# EAGLE board hw2 (EAGLE 7.5.0)
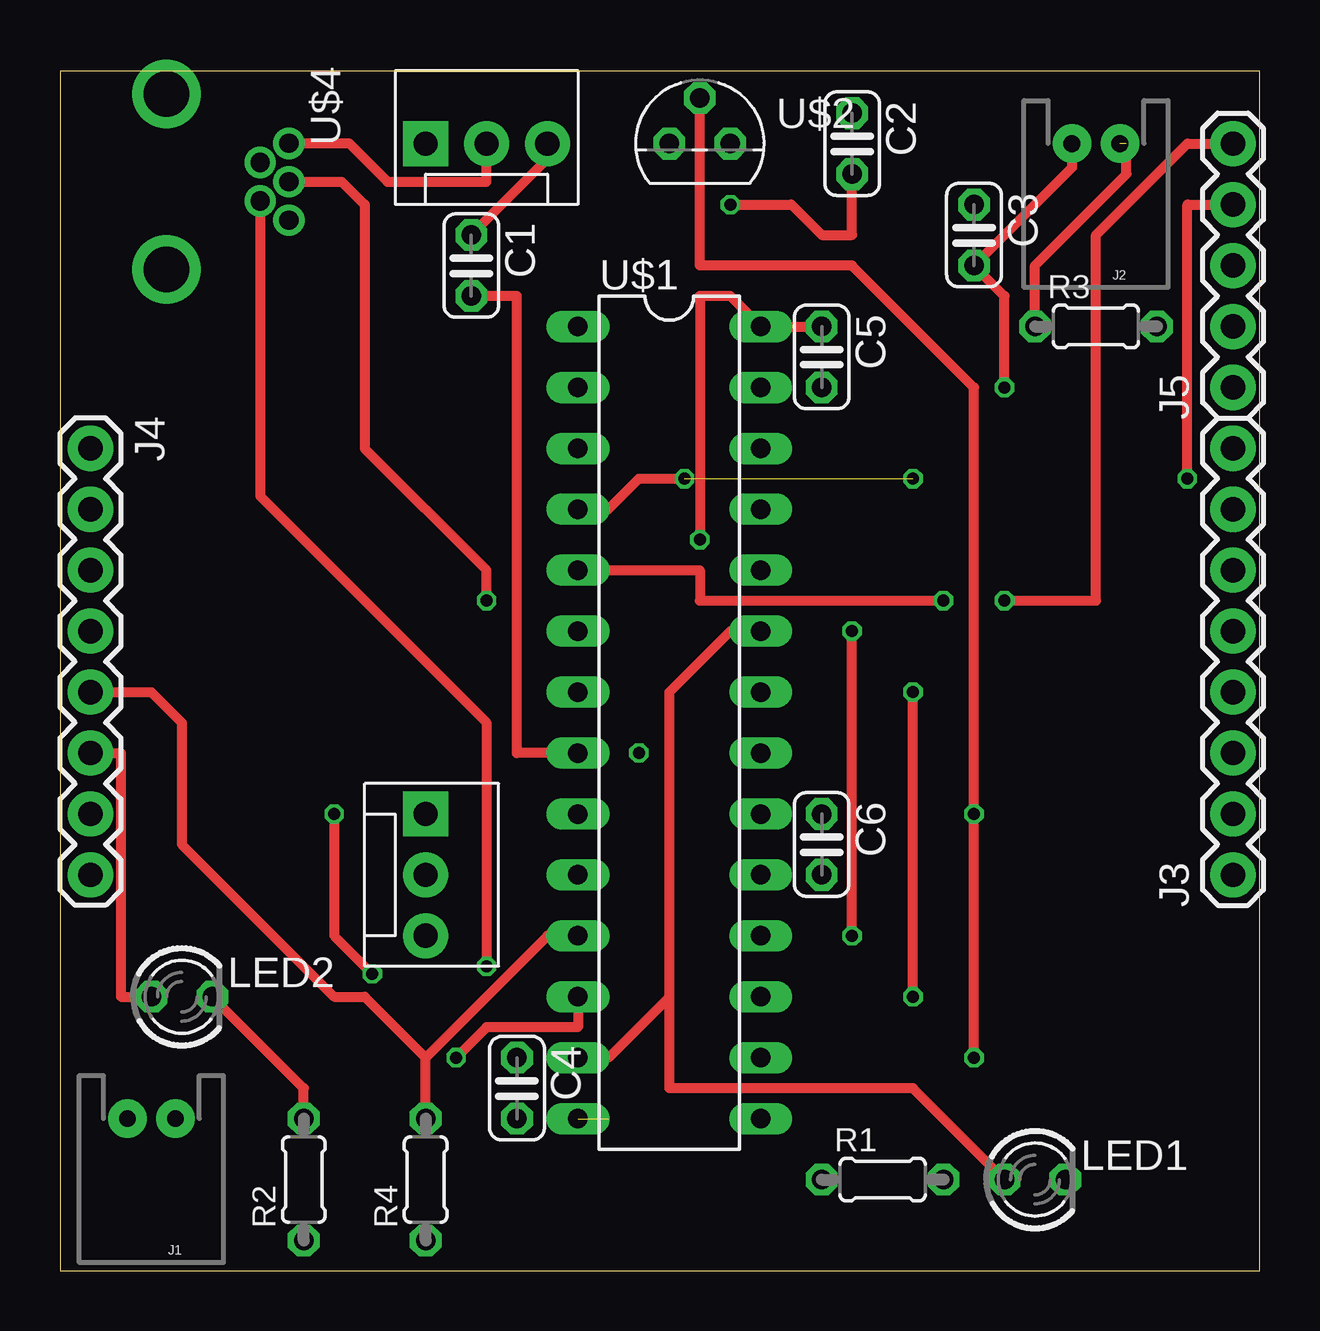
[diagram p0: board, top side]
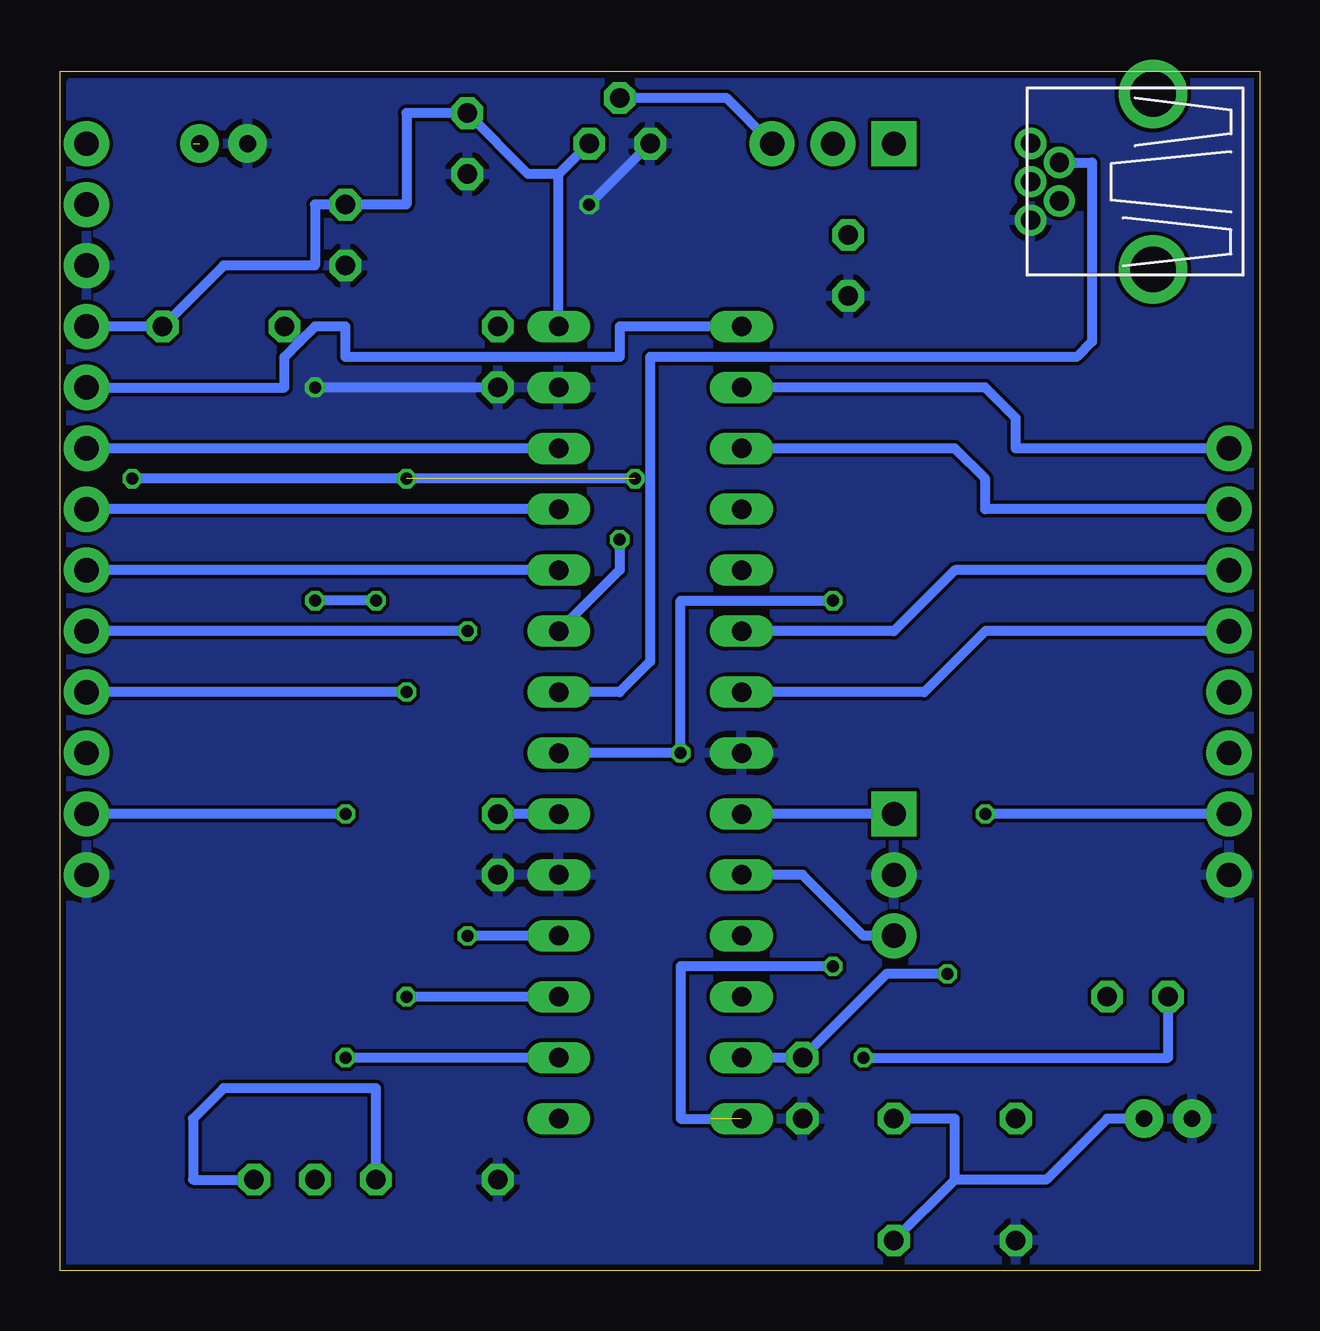
[diagram p1: board, bottom side, seen from below]

Size 50 x 50 mm. Coordinates in mm from the lower left corner, seen from the top.
Outline: 0,0 50,0 50,50 0,50 0,0
Copper layers (1*16): Top 0.035mm / dielectric 1.5mm / Bottom 0.035mm
Design rules "SeeedStudio_2layer_DRU_no_angle_20140221": minimum track width 6mil, minimum drill 12mil, track to track 6mil, track to pad 6mil, pad to pad 6mil, via to via 6mil, smd to smd 0mil, copper to edge 10mil, drill to drill 10mil, minimum pad ring 10mil, minimum via ring 6mil, stop-mask expansion 2mil, vias tented up to drill 100mil, thermal gap 10mil

## Footprints (pad centres in the part's own frame; a part is rotated, then mirrored left to right if it is on the bottom)
C025-024X044 = drill 0.813 octagon: 1 -1.27,0; 2 1.27,0
JST-2-PTH-NS = drill 0.7 pad 1.6: 1 -1,0; 2 1,0
1X08_ROUND = drill 1.016 pad 1.88: 1 0,0; 2 2.54,0; 3 5.08,0; 4 7.62,0; 5 10.16,0; 6 12.7,0; 7 15.24,0; 8 17.78,0
1X05 = drill 1.016 pad 1.88: 1 0,0; 2 2.54,0; 3 5.08,0; 4 7.62,0; 5 10.16,0
LED3MM = drill 0.813 octagon: A -1.27,0; K 1.27,0
0204/5 = drill 0.813 octagon: 1 -2.54,0; 2 2.54,0
DIL28-3 = drill 0.813 long: 1 -16.51,-3.81; 2 -13.97,-3.81; 3 -11.43,-3.81; 4 -8.89,-3.81; 5 -6.35,-3.81; 6 -3.81,-3.81; 7 -1.27,-3.81; 8 1.27,-3.81; 9 3.81,-3.81; 10 6.35,-3.81; 11 8.89,-3.81; 12 11.43,-3.81; 13 13.97,-3.81; 14 16.51,-3.81; 15 16.51,3.81; 16 13.97,3.81; 17 11.43,3.81; 18 8.89,3.81; 19 6.35,3.81; 20 3.81,3.81; 21 1.27,3.81; 22 -1.27,3.81; 23 -3.81,3.81; 24 -6.35,3.81; 25 -8.89,3.81; 26 -11.43,3.81; 27 -13.97,3.81; 28 -16.51,3.81
TO92 = drill 0.813 octagon: 1 -1.27,0; 2 0,1.905; 3 1.27,0
MOLEX-1X3 = drill 1.016 pad 1.88 square: 1 0,0 | drill 1.016 pad 1.88: 2 2.54,0; 3 5.08,0
USB-MB-H = drill 0.8: D+ 5.1,0; D- 3.9,0.8; GND 5.1,-1.6; ID 3.9,-0.8; VBUS 5.1,1.6 | drill 1.9: P$6 0,-3.65; P$7 0,3.65

## Placement (x,y rotation side)
C1  0.1uF  [C025-024X044]  17.14,41.91 270 top
C2  10uF  [C025-024X044]  33.02,46.99 270 top
C3  0.1uF  [C025-024X044]  38.1,43.18 270 top
C4  0.1uF  [C025-024X044]  19.05,7.62 270 top
C5  0.1uF  [C025-024X044]  31.75,38.1 270 top
C6  10uF  [C025-024X044]  31.75,17.78 270 top
J1  USER  [JST-2-PTH-NS]  3.81,6.35 180 top
J2  RESET  [JST-2-PTH-NS]  43.18,46.99 180 top
J3  [1X08_ROUND]  48.9,16.51 90 top
J4  [1X08_ROUND]  1.27,34.29 270 top
J5  [1X05]  48.9,36.83 90 top
LED1  Red  [LED3MM]  40.64,3.81 0 top
LED2  Green  [LED3MM]  5.08,11.43 0 top
R1  330  [0204/5]  34.29,3.81 0 top
R2  330  [0204/5]  10.16,3.81 90 top
R3  10k  [0204/5]  43.18,39.37 0 top
R4  10k  [0204/5]  15.24,3.81 90 top
U$1  PIC  [DIL28-3]  25.4,22.86 270 top
U$2  MCP1702  [TO92]  26.67,46.99 0 top
U$3  SLIDE  [MOLEX-1X3]  15.24,46.99 0 top
U$4  USB-PORT  [USB-MB-H]  4.45,45.4 0 top
U$5  RESONATOR  [MOLEX-1X3]  15.24,19.05 270 top

## Library data of the parts
C1-C6 J1 J2 J5 LED1 LED2 R1-R4 U$1-U$5 = Yuling
J3 J4 = Yuling; PROD_ID: CONN-08437

## Nets
+3V3: C2.1 C3.1 C4.1 C5.1 J4.7 J5.2 LED1.A R3.2 U$1.13 U$1.23 U$1.28 U$2.3
+5V: C1.1 J3.2 U$1.16 U$2.2 U$3.3
A0: J4.1 U$1.2
A1: J4.2 U$1.3
A4/LED: J4.6 LED2.A U$1.12
B2: J4.3 U$1.6
B3: J4.4 U$1.7
B4/USER: J1.1 J4.5 R4.1 R4.2 U$1.11
B7: J3.3
B8: J3.4 U$1.17
B9: J3.5 U$1.18
B13: J3.6 U$1.24
B14: J3.7 U$1.25
B15: J3.8 U$1.26
D+: U$1.21 U$4.D+
D-: U$1.22 U$4.D-
GND: C1.2 C2.2 C3.2 C4.2 C5.2 C6.2 J1.2 J2.2 J3.1 J4.8 J5.3 R1.1 R2.1 U$1.8 U$1.19 U$1.27 U$2.1 U$4.GND U$5.2
MCLR: J2.1 J5.1 R3.1 U$1.1
N$1: U$1.9 U$5.1
N$2: U$1.10 U$5.3
N$4: C6.1 U$1.20
N$8: U$3.2 U$4.VBUS
N$11: LED1.K R1.2
N$12: LED2.K R2.2
PGC: J5.5 U$1.5
PGD: J5.4 U$1.4
USBID: U$1.14 U$4.ID

## Tracks (layer width: path | path; a pad name or v marks a point on that pad's centre or on a via)
+3V3  (via drill 0.5)
  Top 0.406: U$1.13 22.86,8.89 25.4,11.43 | 25.4,11.43 25.4,24.13 27.94,26.67 U$1.23 | LED1.A 35.56,7.62 25.4,7.62 25.4,11.43 | v11.43,19.05 11.43,13.97 v13.02,12.38 | C5.1 U$1.28 27.94,40.64 26.67,40.64 v26.67,30.48
  Bottom 0.406: U$1.13 C4.1 15.56,12.38 v13.02,12.38 | J4.7 v11.43,19.05 | J5.2 R3.2 43.18,41.91 39.37,41.91 39.37,44.45 C3.1 35.56,44.45 35.56,48.26 C2.1 30.48,45.72 29.21,45.72 | U$1.28 29.21,45.72 | 29.21,45.72 U$2.3 | v26.67,30.48 26.67,29.21 U$1.23
+5V  (via drill 0.5)
  Top 0.406: v38.1,8.89 v38.1,19.05 38.1,36.83 33.02,41.91 26.67,41.91 U$2.2 | U$3.3 20.32,46.35 C1.1
  Bottom 0.406: U$1.16 v38.1,8.89 | v38.1,19.05 J3.2 | U$2.2 22.23,48.9 U$3.3
A0
  Bottom 0.406: J4.1 10.16,34.29 10.16,35.56 11.43,36.83 U$1.2
A1
  Bottom 0.406: J4.2 11.43,31.75 11.43,33.02 12.7,34.29 U$1.3
A4/LED  (via drill 0.5)
  Top 0.406: J4.6 2.54,21.59 2.54,11.43 LED2.A | U$1.12 21.59,10.16 17.78,10.16 v16.51,8.89
  Bottom 0.406: v16.51,8.89 3.81,8.89 LED2.A
B2
  Bottom 0.406: J4.3 12.7,29.21 15.24,26.67 U$1.6
B3
  Bottom 0.406: J4.4 11.43,26.67 13.97,24.13 U$1.7
B4/USER
  Top 0.406: R4.2 15.24,8.89 | 15.24,8.89 20.32,13.97 U$1.11 | J4.5 3.81,24.13 5.08,22.86 5.08,17.78 11.43,11.43 12.7,11.43 15.24,8.89
  Bottom 0.406: J1.1 6.35,6.35 8.89,3.81 12.7,3.81 | 12.7,3.81 R4.1 | 12.7,3.81 12.7,6.35 R4.2
B8  (via drill 0.5)
  Top 0.406: v35.56,11.43 v35.56,24.13
  Bottom 0.406: U$1.17 v35.56,11.43 | v35.56,24.13 J3.4
B9  (via drill 0.5)
  Top 0.406: v33.02,13.97 v33.02,26.67
  Bottom 0.406: U$1.18 v33.02,13.97 | v33.02,26.67 J3.5
B13
  Bottom 0.406: U$1.24 J3.6
B14
  Bottom 0.406: U$1.25 J3.7
B15
  Bottom 0.406: U$1.26 J3.8
D+  (via drill 0.5)
  Top 0.406: U$4.D+ 11.75,45.4 12.7,44.45 12.7,34.29 17.78,29.21 v17.78,27.94
  Bottom 0.406: U$1.21 v24.13,21.59 24.13,27.94 v17.78,27.94
D-
  Bottom 0.406: U$4.D- 6.99,46.2 6.99,38.73 7.62,38.1 25.4,38.1 25.4,25.4 26.67,24.13 U$1.22
GND  (via drill 0.5)
  Top 0.406: J2.2 42.18,45.99 C3.2 39.37,40.64 v39.37,36.83 | v27.94,44.45 30.48,44.45 31.75,43.18 33.02,43.18 C2.2 | U$1.8 19.05,21.59 19.05,40.64 C1.2
  Bottom 0.406: C5.2 v39.37,36.83 | U$2.1 v27.94,44.45
  pour Bottom: 0,49.53 0,0 49.53,0 49.53,49.53
MCLR  (1 unrouted)
  Top 0.406: R3.1 40.64,41.91 44.45,45.72 44.45,46.99
  Bottom 0.406: 40.01,38.73 39.37,39.37 38.1,39.37 38.1,38.1 26.67,38.1 26.67,39.37 U$1.1 | 40.01,38.73 R3.1 | J5.1 40.64,36.83 40.64,38.1 40.01,38.73
N$1
  Bottom 0.406: U$5.1 U$1.9
N$2
  Bottom 0.406: U$5.3 16.51,13.97 19.05,16.51 U$1.10
N$4
  Bottom 0.406: U$1.20 C6.1
N$8
  Top 0.406: U$4.VBUS 12.05,47 13.65,45.4 17.78,45.4 U$3.2
N$11
  Bottom 0.406: R1.2 36.83,7.62 43.18,7.62 44.45,6.35 44.45,3.81 LED1.K
N$12
  Top 0.406: R2.2 10.16,7.62 LED2.K
PGC  (via drill 0.5)
  Top 0.406: U$1.5 26.67,29.21 26.67,27.94 v36.83,27.94 | v39.37,27.94 43.18,27.94 43.18,43.18 46.99,46.99 J5.5
  Bottom 0.406: v36.83,27.94 v39.37,27.94
PGD  (via drill 0.5)  (1 unrouted)
  Top 0.406: U$1.4 22.86,31.75 24.13,33.02 v26.04,33.02 | v46.99,33.02 46.99,44.45 J5.4
  Bottom 0.406: v26.04,33.02 v46.99,33.02
  other vias: 35.56,33.02
USBID  (via drill 0.5)  (1 unrouted)
  Top 0.406: U$4.ID 8.35,32.3 17.78,22.86 v17.78,12.7
  Bottom 0.406: v17.78,12.7 24.13,12.7 24.13,6.35 22.86,6.35